# Altium PCB 555 LED BLINKER PCB BOARD.PcbDoc
Units mil, origin at the board's own origin, x right, y up, seen from the top; angles counter-clockwise.
Board outline 1280.03 x 830.03 mil, 2 copper layers (Top Layer, Bottom Layer); 7 components, 7 nets, 24 pads, 0 vias.
Unrouted connection lines stored in the file: 3.
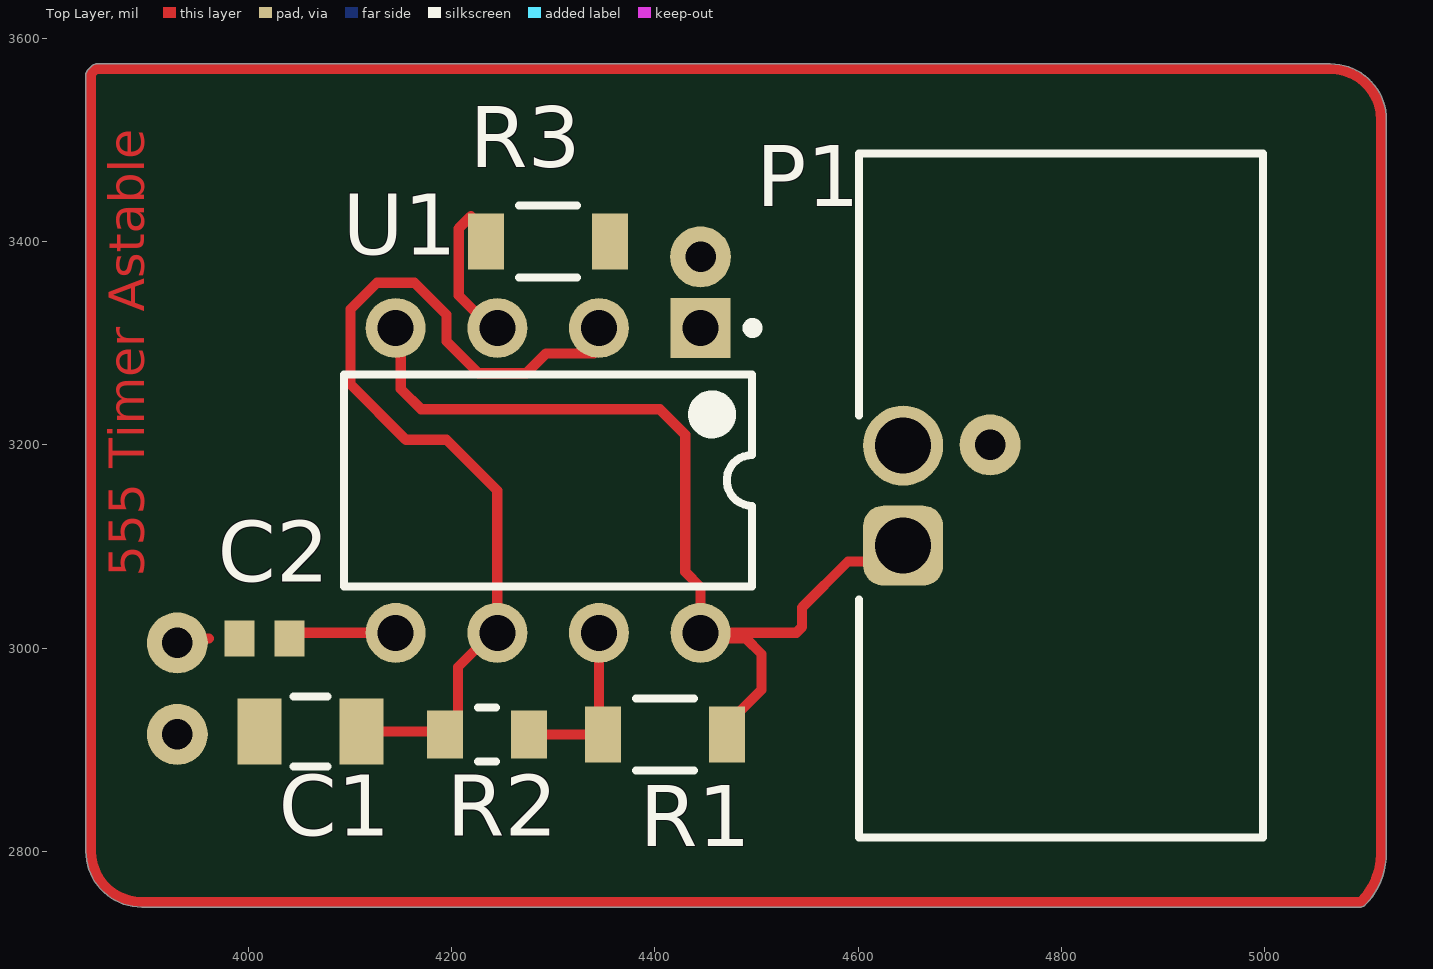
[diagram p0: Top Layer view]
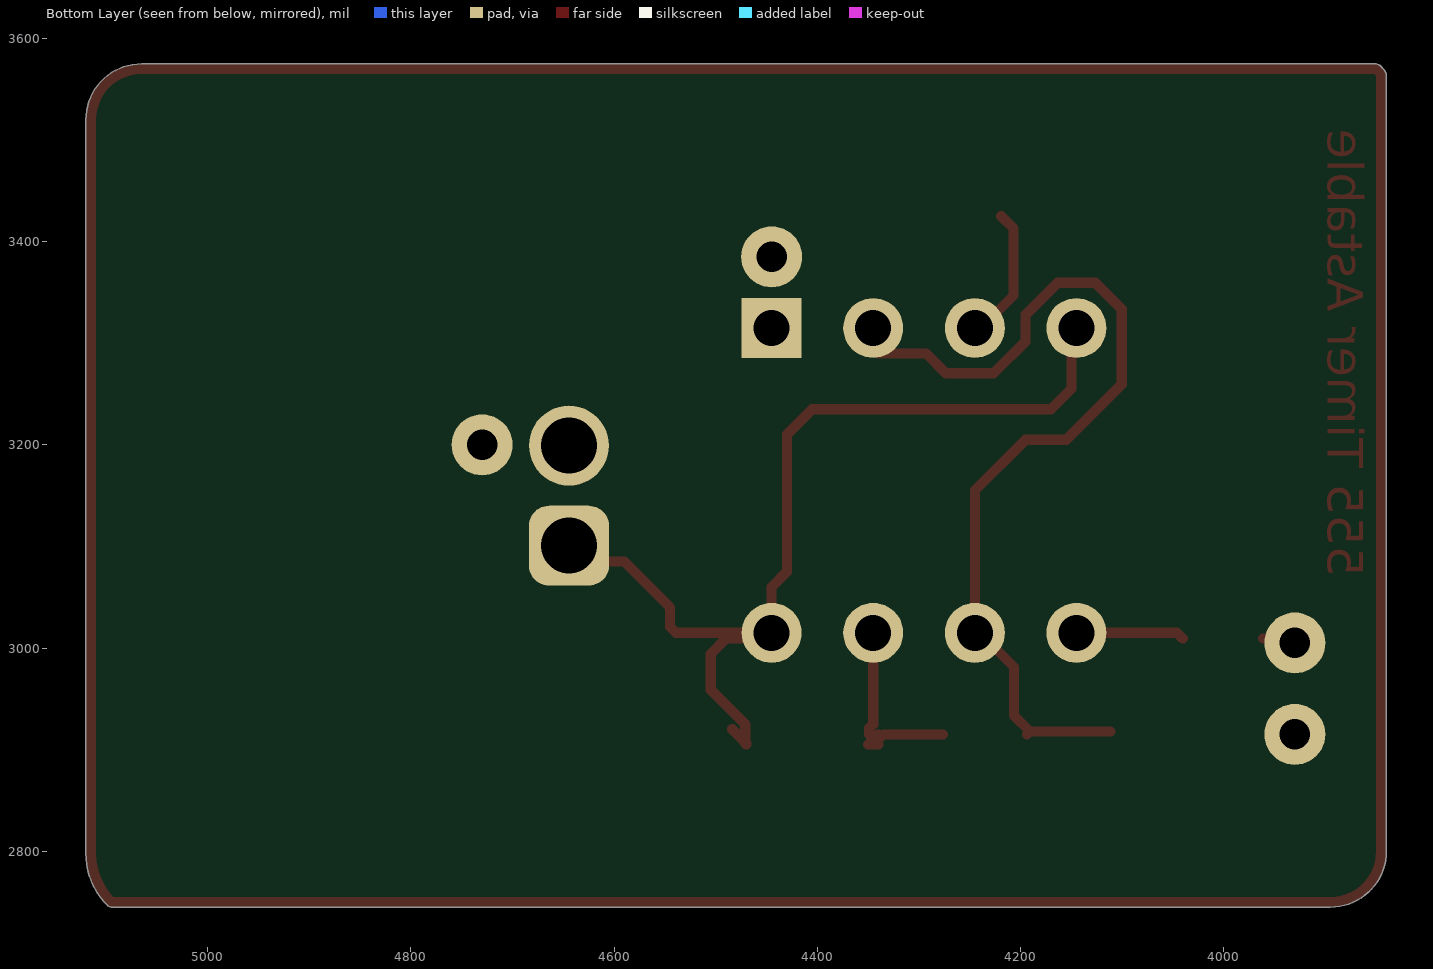
[diagram p1: Bottom Layer view, seen from below]
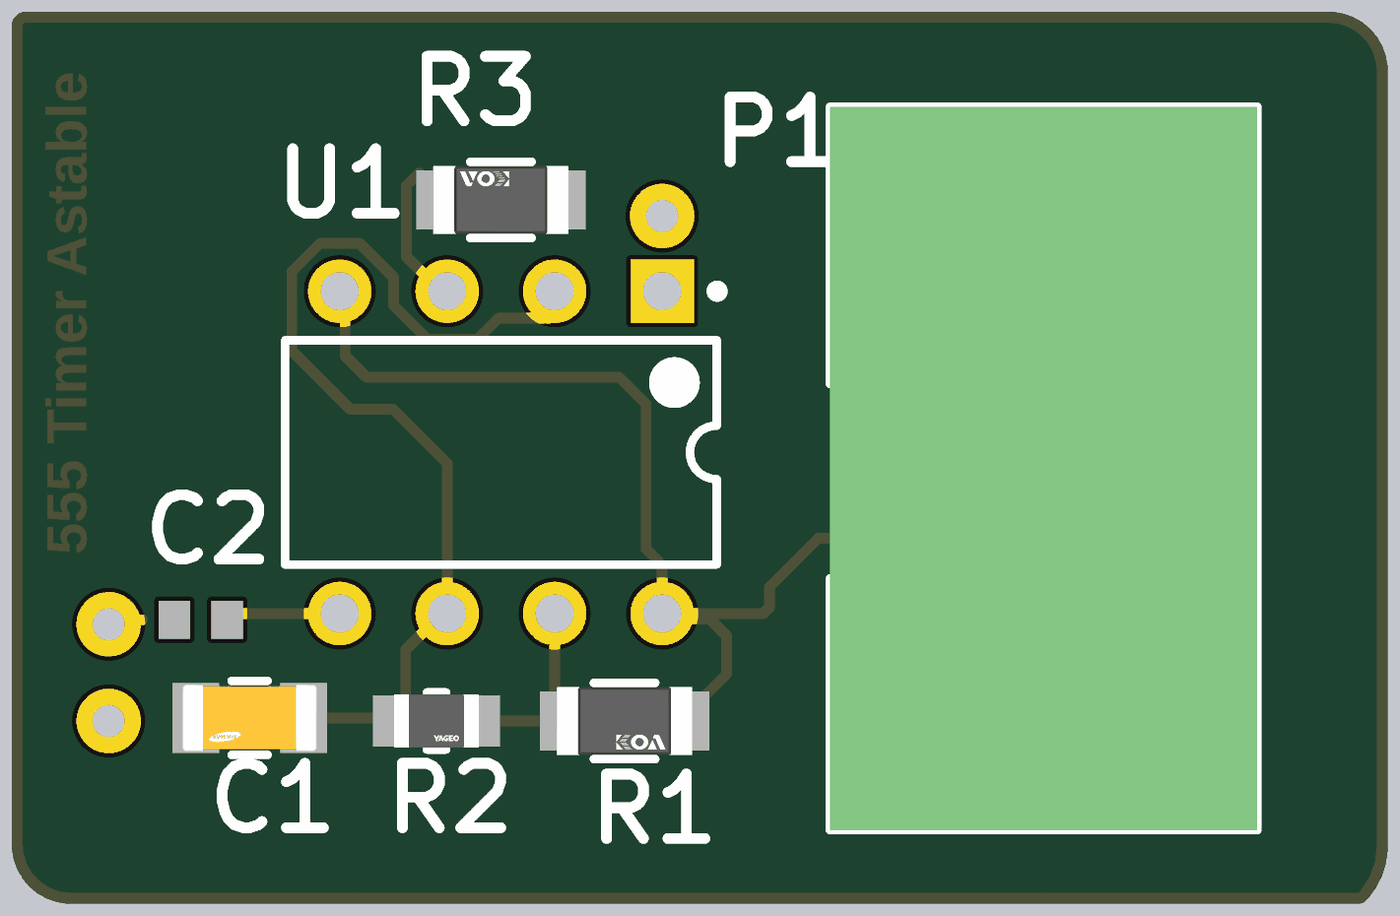
[diagram p2: 3D render of the assembled board from above, using the file's embedded part models]

## Layer stack, top to bottom
Top Solder: solder mask 0.4, Solder Resist, Dk 3.5
Top Layer: signal copper 1.4
Dielectric 1: dielectric 12.6, FR-4, Dk 4.8
Bottom Layer: signal copper 1.4
Bottom Solder: solder mask 0.4, Solder Resist, Dk 3.5

## Board outline
3839.99,2800 3839.99,3565 3841.45,3568.55 3846.45,3573.55 3850,3575.01 5065,3575.01 cw(c5065,3520) 5120.02,3520 5120.02,2798.28 cw(c5046.72,2798.28) 5098.55,2746.45 5095,2744.99 3895,2744.99 cw(c3895,2800)

## Design rules (kind name [scope] priority, off if disabled: settings)
Clearance [All] p1: gap=10 ignorepadtopadclearanceinfootprint=FALSE
PolygonConnect [All] p1: connectstyle=Relief reliefconductorwidth=10 reliefentries=4 polygonreliefangle="90 Angle" airgapwidth=10
RoutingVias [All] p1: holewidth=28 width=50 viastyle="Through Hole" minholewidth=28 minwidth=50 maxholewidth=28 maxwidth=50
SolderMaskExpansion [All] p1: expansion=4 istentingtop=FALSE
SupplyNets "Schematic Supply Nets" [InNet('GND')] p1: voltage=0.000
Width [All] p1: maxlimit=10 minlimit=10 preferedwidth=10
30 further rules are at their usual default settings.

## Classes and differential pairs
component class "555 LED BLINKER PCB BOARD": C1 C2 "LED 1" P1 R2 R3

## Components (designator, comment, footprint, x,y, rotation, side; value= is the part's Value field where it differs from the comment)
C1 "10UF" FP-CL31-IPC_C 4061.17,2917.88 r180 top
C2 "0.01UF" CAPC1608X92X38LL15T08 4015.63,3009.23 r0 top
P1 "BATTERY" 691382040002 4800,3150 r90 top
R1 "1k" FP-RN73R2B-MFG 4410,2915 r0 top
R2 "10k" FP-AT0805-MFG 4235,2915 r0 top
R3 "1K" FP-RN73R2B-MFG 4295,3400 r180 top
U1 "NE555P" P0008A 4295,3165 r270 top

## Footprints (in the part's own frame and the unit in brackets; to place one, negate y for a bottom-side part, rotate by r counter-clockwise, add the part's x,y. Pads: shape width x height; smd on the part's side, far side on the other; paste and mask are expansions set on the pad)
691382040002 [mm] "Horizontal PCB Header with Flanges, pitch 2.5mm, 02p"
  rrect50% 2x2 hole 1.4: 1(-1.25,3.95)
  round 2 hole 1.4: 2(1.25,3.95)
  silkscreen extent -8.55,-5.05 8.55,5.05, body extent -8.55,-5.05 8.55,5.05, height 8.15
CAPC1608X92X38LL15T08 [mm] "Chip Capacitor, 2-Leads, Body 1.60x0.80mm, IPC High Density"
  rect 0.75x0.9 smd: 1(-0.625,0) 2(0.625,0)
  body extent -0.87,-0.48 0.87,0.48, height 0.92
FP-AT0805-MFG [mm]
  rect 0.9x1.2 smd paste+0 mask+0: 1(-1.05,0) 2(1.05,0)
  silkscreen extent -0.23,-0.67 0.23,0.67, body extent -1.6,-0.77 1.6,0.77, height 0.25
FP-CL31-IPC_C [mil]
  rect 43.52x65.28 smd paste+0 mask+0: 1(-50.25,0) 2(50.25,0)
  silkscreen extent -17,-34 17,34, body extent -76,-38 76,38, height 10
FP-RN73R2B-MFG [mm]
  rect 0.9x1.4 smd paste+0 mask+0: 1(-1.55,0) 2(1.55,0)
  silkscreen extent -0.72,-0.9 0.72,0.9, body extent -2.1,-1 2.1,1, height 0.25
P0008A [mm] "DIP, 8-Leads, Body 10.15x6.6mm, Pitch 2.54mm"
  rect 1.5x1.5 hole 0.9: 1(-3.81,3.81)
  round 1.5 hole 0.9: 2(-3.81,1.27) 3(-3.81,-1.27) 4(-3.81,-3.81) 5(3.81,-3.81) 6(3.81,-1.27) 7(3.81,1.27) 8(3.81,3.81)
  silkscreen extent -3.93,-5.1 2.65,5.24, body extent -3.95,-5.07 3.95,5.07, height 5.08

## Part data
C1: library part CMP-13271-001546-1, "Cap Ceramic 10uF 16V X5R ±10% SMD 1206 +85°C Embossed T/R", Capacitance=10uF, Case Code (Imperial)=1206, Case Code (Metric)=3216, Dielectric=X5R, Max Operating Temperature=85°C, Min Operating Temperature=-55°C, Tolerance=10%, Voltage Rating=16V, Case/Package=1206, Depth=1.6mm, Height=0.85mm, Length=3.2mm, Mount="Surface Mount", Packaging="Tape and Reel", Radiation Hardening=No, Thickness=0.037inch, Width=0.063inch
C2: library part CMP-1035-02320-2, Manufacturer=Vitramon, Part Number=VJ0603Y103JXAAC
P1: library part CMP-1502-01759-3, "Terminal Block, 2.50MM Pitch, Horizontal Pcb Header, Flanges, 300VAC, 2 Pins", Color=Green, Current=12A, Max Operating Temperature=105°C, Min Operating Temperature=-40°C, Voltage=300V, Contact Plating=Tin, Gender=Male, Lead Pitch=2.5mm, Mount="Through Hole", Number of Levels=1, Number of Pins=2, Number of Positions=2, Number of Positions Per Level=2, Packaging=Box, Pitch=2.4892mm, RoHS=Compliant, Termination=Solder
R1 R3: library part CMP-04015-029161-1, "1kΩ ±1% 0.25W, 1/4W Chip Resistor 1206 (3216 Metric) Moisture Resistant Thin Film"
R2: library part CMP-03412-049031-1, "Thin Film Chip Resistors Automotive Grade 10kΩ 0.5% 50ppm/°C 0805", Case/Package=0805, Max Operating Temperature=155°C, Max Power Dissipation=125mW, Min Operating Temperature=-55°C, Ratings=AEC-Q200, Resistance=10kR, Resistor Type="Thin Film", Temperature Coefficient=50ppm/°C, Tolerance=0.5%, Features="Moisture Resistant", Height=0.024inch, Length=0.079inch, Number of Terminations=2, Packaging="Tape and Reel", RoHS Compliant=Yes, Series=AT, Width=0.049inch
U1: library part CMP-2000-04954-1, "Precision Timer, 4.5 to 16 V, 0 to 70 degC, 8-Pin DIP, Pb-Free, Tube", Manufacturer=TexasInstruments, Maximum High Level Output Current=-200mA, Maximum Low Level Output Current=200mA, Operating Supply Voltage=5, Package=8PDIP, Package Description="8-Pin Double In-line Package, Body 9.59 x 6.35 mm, Pitch 2.54 mm", Package Reference=P8, Category=Timer, Datasheet URL=http://www.ti.com/general/docs/lit/getliterature.tsp?genericPartNumber=NE555&fileType=pdf, Datasheet Version="Rev. I, 09/2014", Manufacturer URL=http://www.ti.com/, Number of Internal Timers=1, Package URL=http://www.ti.com/lit/ml/mpdi001b/mpdi001b.pdf, Packaging=Rail/Tube, Rad Hard=No, Type=Standard

## Free pads (board coordinates)
  round 60 hole 30: 2(3930,3005) 3(4445,3385) 4(4730,3200) 5(3930,2915)

## Nets (pads, with @x,y where several pads share a name; then routed paths per layer and width w, separated by ;. In a path a pad name is that pad's centre, name@x,y a point inside that pad or via, vN(x,y) a via of type N, cw(c..) or ccw(c..) an arc to the next point about the centre after c; other vN are vias at no path point)
GND: C1.2 C2.1 P1.2 U1.1
NetC1_1: C1.1 R2.1 U1.2 U1.6 | length 945.3
  Top Layer w10: C1.1 R2.1@4190.78,2917.88 ; R2.1 R2.1@4190.78,2917.88 ; U1.2 4340,3310 4340,3290 4293.04,3290 4273.51,3270.47 4226.56,3270.47 4195,3302.03 4195,3327.97 4163.44,3359.53 4126.56,3359.53 4100.47,3333.44 4100.47,3259.53 4155,3205 4195,3205 4245,3155 U1.6 4240,3015 4206.38,2981.38 4206.38,2933.47 R2.1@4190.78,2917.88
NetC2_2: C2.2 U1.5 | length 107.2
  Top Layer w10: C2.2 4046.01,3015 U1.5
"NetLED 1_1": R3.1
NetP1_1: P1.1 R1.2 U1.4 U1.8 | length 1012.3
  Top Layer w10: U1.4 4140,3315 4135,3310 4150,3295 4150,3255 4170,3235 4405,3235 4430,3210 4430,3075 4445,3060 U1.8 ; R1.2@4483.74,2920 4470,2906.26 4470,2905 4471.02,2906.02 R1.2 4471.02,2924.84 4505,2958.82 4505,2994.14 4489.53,3009.61 4450.39,3009.61 U1.8 ; P1.1 4628.82,3085.12 4590.12,3085.12 4545,3040 4545,3020.86 4539.14,3015 U1.8
NetR1_1: R1.1 U1.7 | length 101.6
  Top Layer w10: U1.7 4345,2925 4348.98,2921.02 R1.1
NetR3_2: R3.2 U1.3 | length 134.1
  Top Layer w10: R3.2@4218.98,3425 4207.03,3413.05 4207.03,3347.07 4239.1,3315 U1.3
pads on no net: R2.2
copper on no net: | length 4395.8
  Top Layer w10: 3895,3570 5065,3570 cw(c5065,3520) 5115,3520 5115,2835 5115,2798.28 cw(c5046.72,2798.28) 5095,2750 3895,2750 cw(c3895,2800) 3845,2800 3845,3565 3850,3570 4035,3570 ; 3930,3005 3940.77,3009.23 3961.26,3009.23 ; 4340,2905 4350,2905 4340,2915 ; 4345,2905 4335,2915 4280,2915 ; 4276.34,2915 4280,2915 ; 4276.34,2915 4280,2915 ; 4276.34,2915 4280,2915

## Other copper
Top Layer:
  text "555 Timer Astable" at 3909.28,3070 h60 r90

## Silkscreen, mask and mechanical layers (free items; w line width, h text height)
Mechanical 1:
  lines w47.24: 1000,1000 1000,5000 7000,5000 7000,1000 1000,1000